# Altium PCB 遥控按键.PCBDOC
Units mm, origin at the board's own origin, x right, y up, seen from the top; angles counter-clockwise.
Board outline 70.36 x 87.5 mm, 2 copper layers (Top Layer, Bottom Layer); 27 components, 30 nets, 102 pads, 49 vias.
Unrouted connection lines stored in the file: 6.
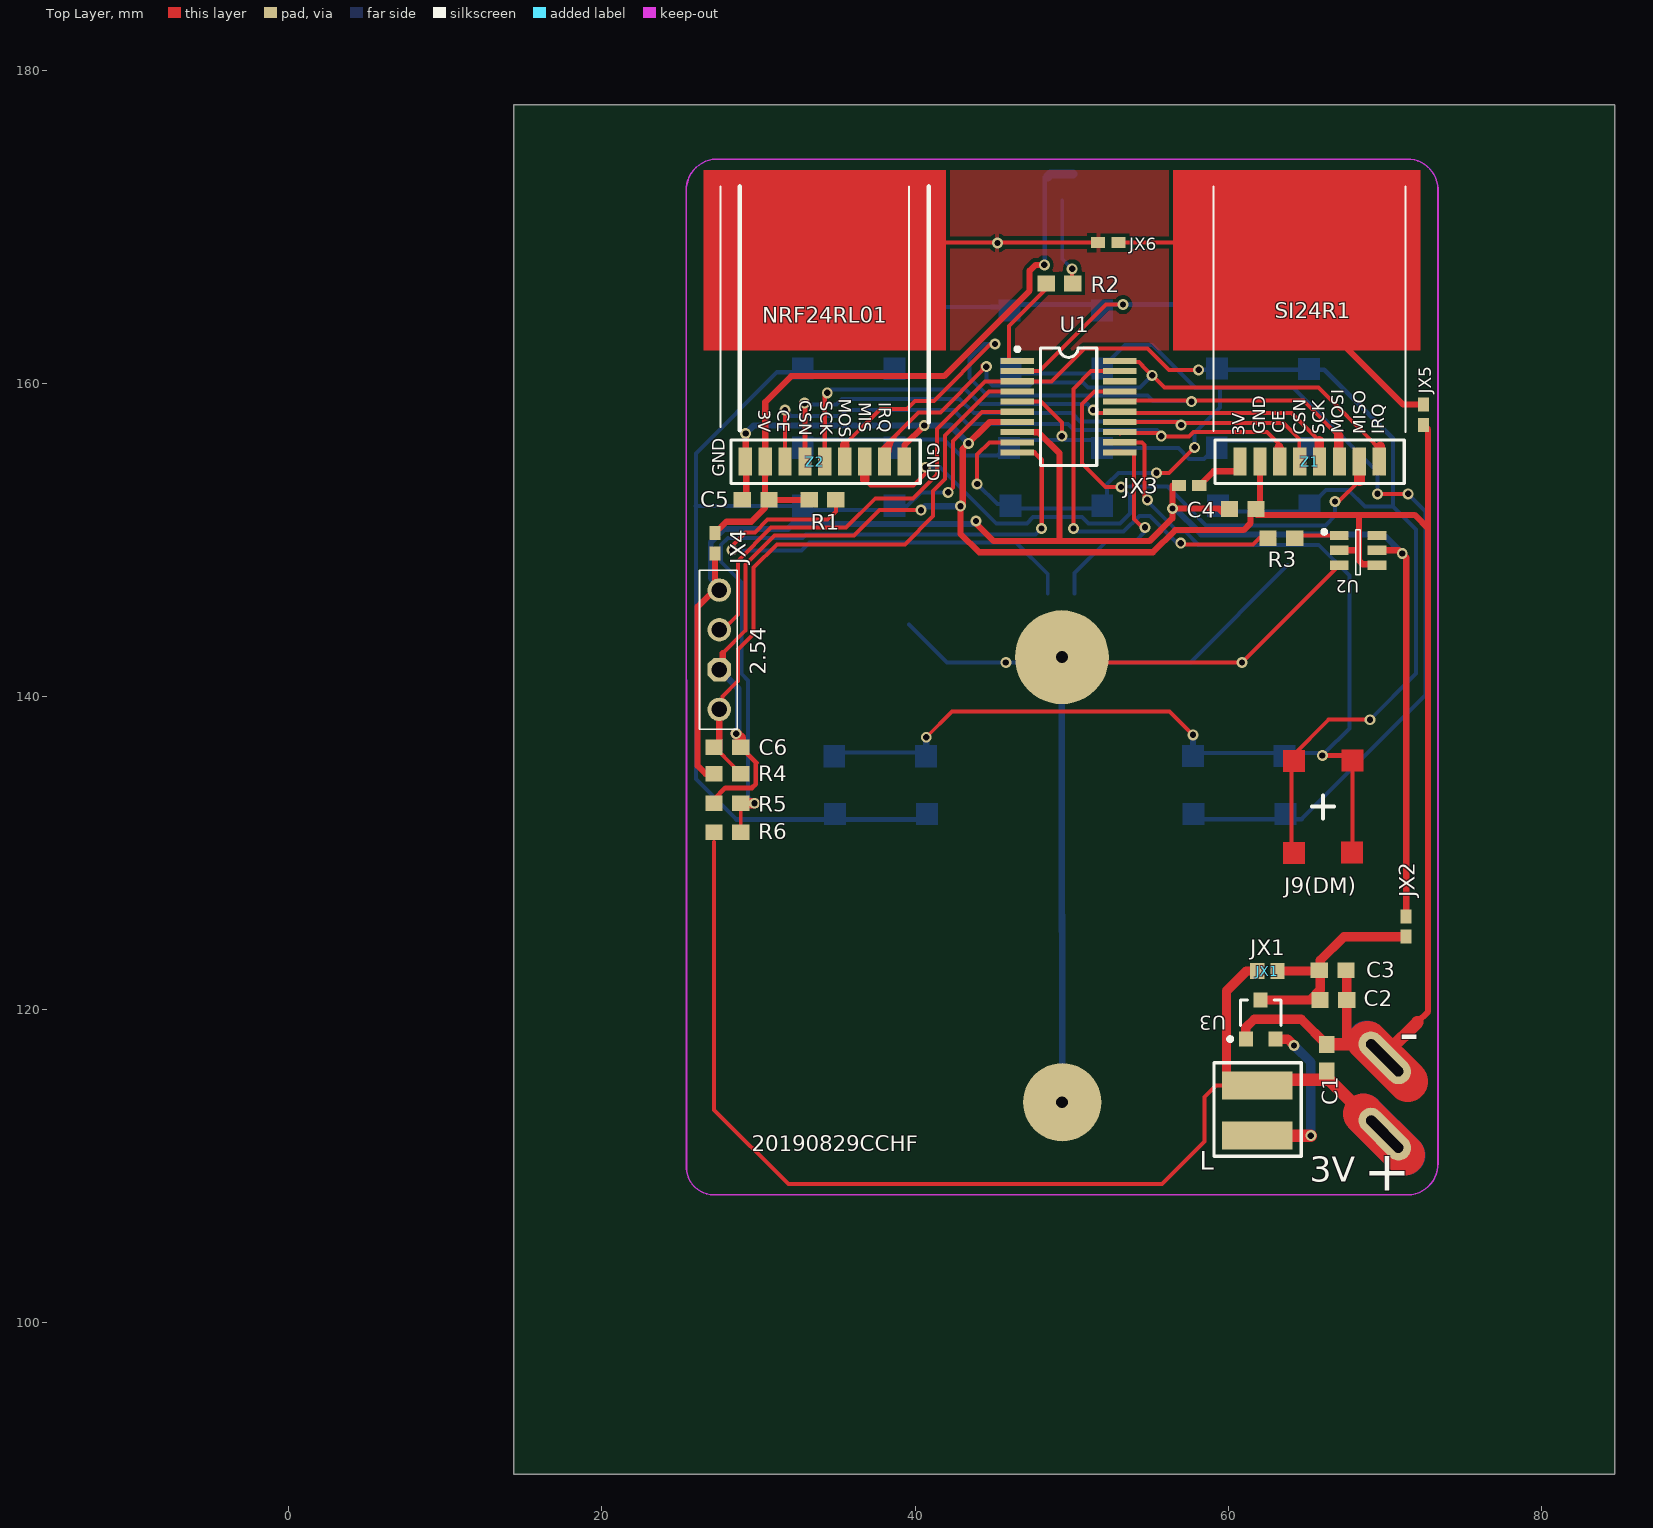
[diagram p0: Top Layer view]
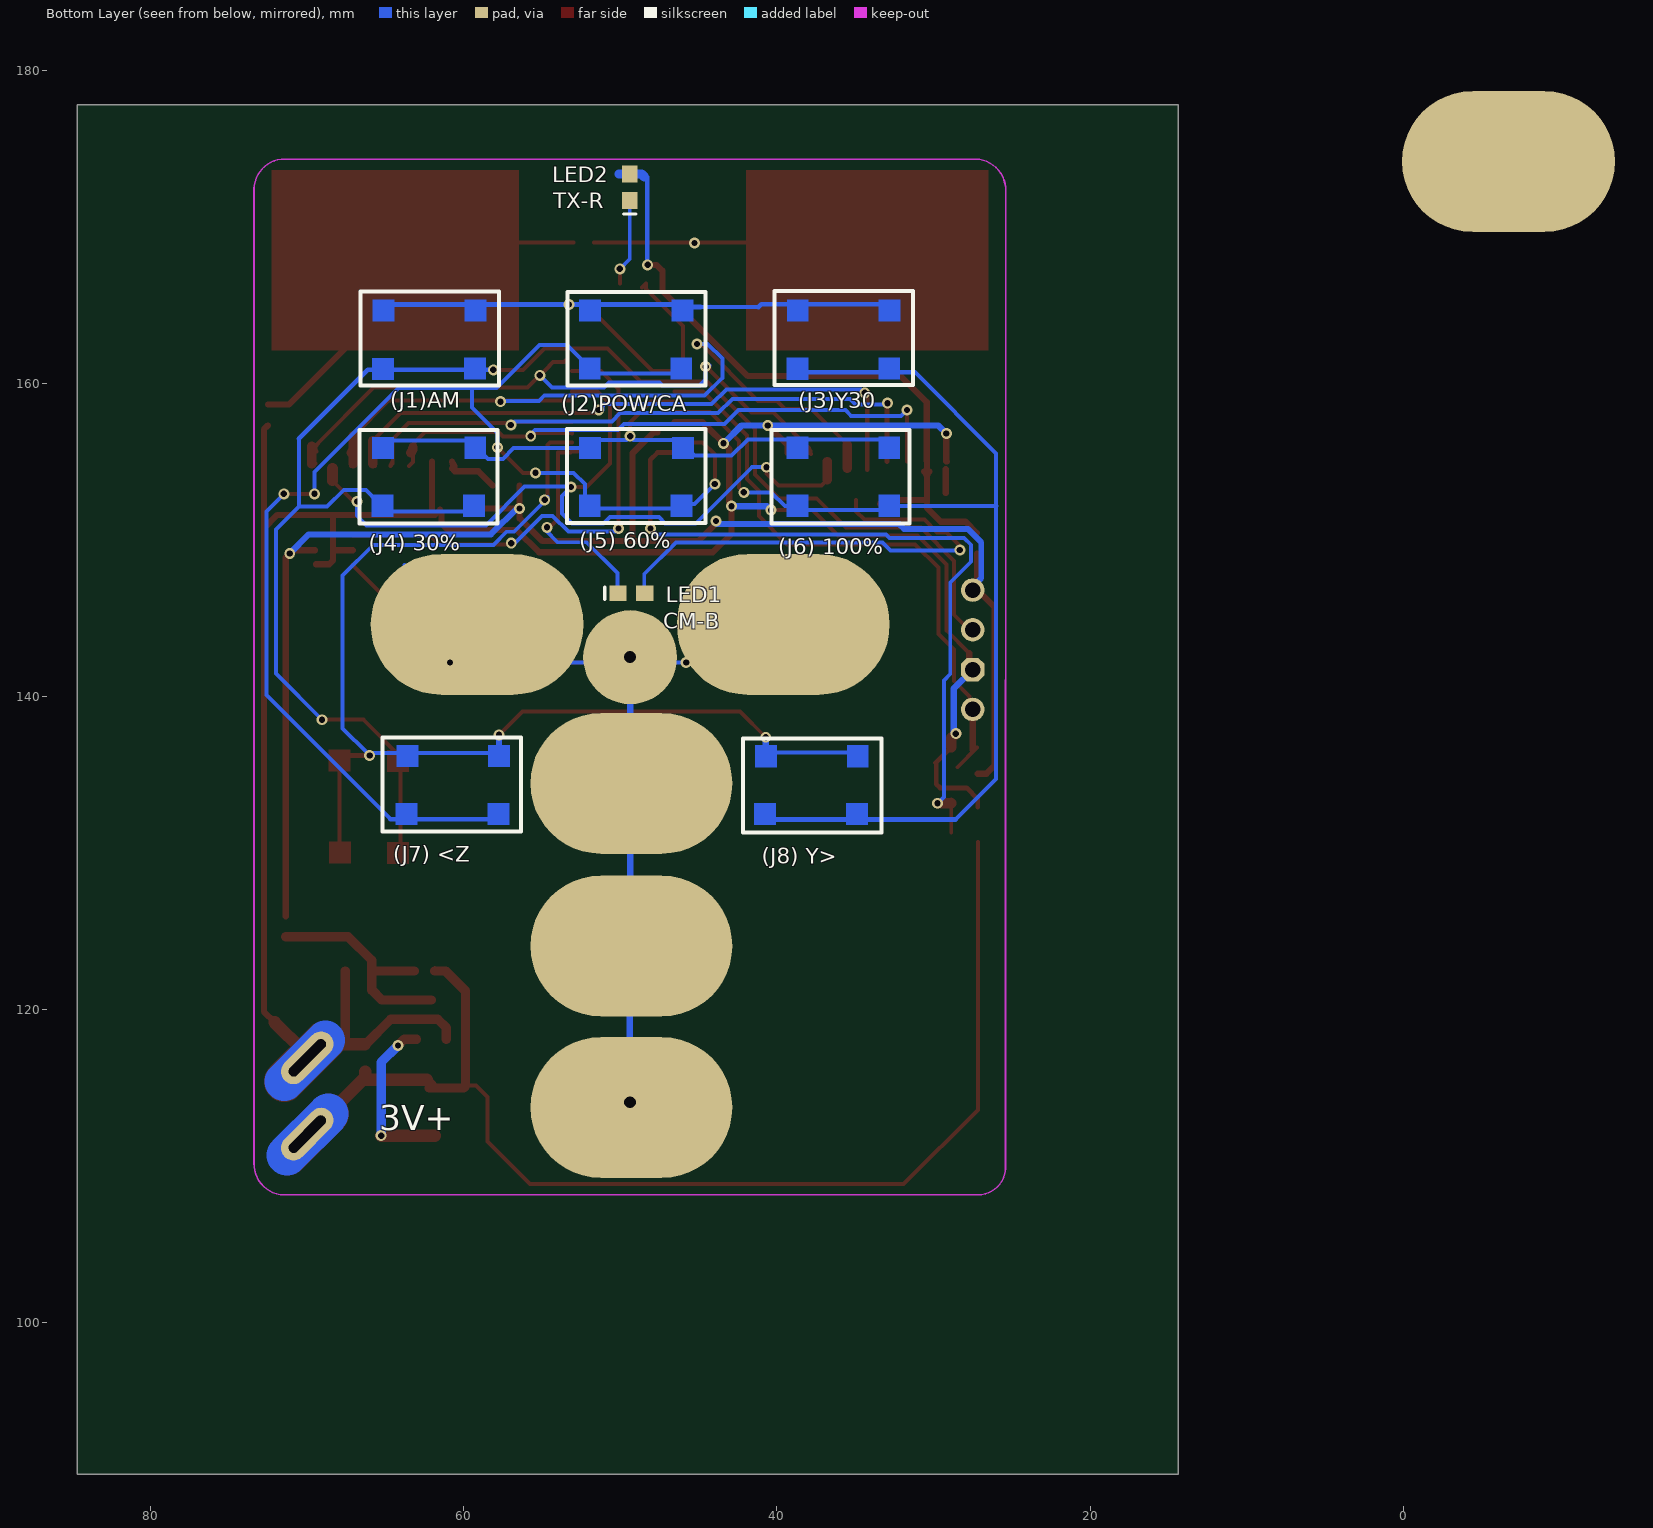
[diagram p1: Bottom Layer view, seen from below]

## Layer stack, top to bottom
Top Layer: signal copper 0.0356
Dielectric: dielectric 0.32, FR-4, Dk 4.8
Bottom Layer: signal copper 0.0356

## Board outline
19.304,90.297 84.709,90.297 84.709,177.8 14.351,177.8 14.351,90.297

## Design rules (kind name [scope] priority, off if disabled: settings)
Clearance [All] p1: gap=0.254
FabricationTestPointUsage TestPointUsage [All] p1: valid=0 allowmultiple=FALSE
FabricationTestpoint Testpoint [All] p1: side=3 testpointundercomponent=TRUE minsize=1.016 maxsize=2.54 preferedsize=1.524 minholesize=0 maxholesize=1.016 preferedholesize=0.813 testpointgrid=0.025 allowsidetop=TRUE allowsidebottom=TRUE usegrid=TRUE gridtolerance=0
PolygonConnect [All] p1: connectstyle=Relief reliefconductorwidth=0.254 reliefentries=4 polygonreliefangle="90 Angle"
RoutingVias [All] p1: holewidth=0.4 width=0.8 viastyle="Through Hole" minholewidth=0.4 minwidth=0.6 maxholewidth=1 maxwidth=1.5
SilkscreenOverComponentPads [All] p1: minsilkscreentomaskgap=0.254
SolderMaskExpansion [All] p1: expansion=0.102
Width Width_9 [InNet('3V3')] p1: maxlimit=1 minlimit=0.254 preferedwidth=0.6 toplayer_prefwidth=0.55 minimp=50.000000 maximp=50.000000 favimp=50.000000
Width Width_8 [InNet('3V+')] p2: maxlimit=3 minlimit=0.254 preferedwidth=0.8 toplayer_prefwidth=0.55 minimp=50.000000 maximp=50.000000 favimp=50.000000
Width Width_7 [InNet('L-3V')] p3: maxlimit=1 minlimit=0.254 preferedwidth=0.6 toplayer_prefwidth=0.55 minimp=50.000000 maximp=50.000000 favimp=50.000000
Width Width_6 [InNet('T-3V')] p4: maxlimit=1 minlimit=0.254 preferedwidth=0.6 toplayer_prefwidth=0.55 minimp=50.000000 maximp=50.000000 favimp=50.000000
Width Width_5 [InNet('3V')] p5: maxlimit=1 minlimit=0.254 preferedwidth=0.6 toplayer_prefwidth=0.39 minimp=50.000000 maximp=50.000000 favimp=50.000000
Width Width_4 [InNet('T-3V')] p6: maxlimit=1 minlimit=0.254 preferedwidth=0.6 toplayer_prefwidth=0.55 minimp=50.000000 maximp=50.000000 favimp=50.000000
Width Width_3 [InNet('D1-')] p7: maxlimit=1 minlimit=0.3 preferedwidth=0.8 toplayer_prefwidth=0.6 minimp=50.000000 maximp=50.000000 favimp=50.000000
Width Width_2 [InNet('GND')] p8: maxlimit=3 minlimit=0.254 preferedwidth=0.8 toplayer_prefwidth=0.39 minimp=50.000000 maximp=50.000000 favimp=50.000000
Width Width_1 [InNet('3V')] p9: maxlimit=1 minlimit=0.254 preferedwidth=0.6 toplayer_prefwidth=0.55 minimp=50.000000 maximp=50.000000 favimp=50.000000
Width [All] p10: maxlimit=2 minlimit=0.254 preferedwidth=2 bottomlayer_prefwidth=0.8 minimp=50.000000 maximp=50.000000 favimp=50.000000
25 further rules are at their usual default settings.

## Components (designator, comment, footprint, x,y, rotation, side; value= is the part's Value field where it differs from the comment)
2.54 "2.54HP" HDR1X4 27.5,139.167 r90 top (schematic designator SX)
C1 "10uf" CR1608-0603 66.3,116.916 r90 top locked
C2 "10uf" CR1608-0603 66.726,120.6 r180 top
C3 "0.1uf" CR1608-0603 66.675,122.5 r0 top
C4 "0.01uf" CR1608-0603 60.935,151.968 r180 top
C5 "0.01uf" CR1608-0603 29.82,152.552 r0 top
C6 "0.1uf" CR1608-0603 28.016,136.754 r0 top
JX1 "JX1" CR1005-0402#1 62.509,122.453 r0 top
JX2 "JX3" CR1005-0402#2 71.374,125.298 r270 top
JX3 "JX2" CR1005-0402#2 57.506,153.467 r0 top
JX4 "JX2" CR1005-0402#2 27.229,149.784 r270 top
JX5 "JX2" CR1005-0402#2 72.492,157.988 r90 top
JX6 "JX2" CR1005-0402#2 52.349,168.986 r0 top
L "22UH" L7 60.9,113.741 r270 top locked
LED1 "CM-B" CC1608-0603 49.301,146.583 r180 bottom
LED2 "TX-R" CC1608-0603 49.403,172.517 r90 bottom
R1 "1K" CR1608-0603 34.087,152.552 r180 top
R2 "4.7K" CR1608-0603 49.225,166.37 r180 top
R3 "4.7K" CR1608-0603 63.398,150.089 r180 top
R4 "10K" CR1608-0603 28.016,135.052 r0 top
R5 "500K" CR1608-0603 28.016,133.172 r180 top
R6 "500K" CR1608-0603 28.016,131.318 r180 top
U1 "STM8L051F3P6" SSOP20 49.809,158.501 r270 top locked
U2 "UTouch1B" SOT23-6_M 68.301,149.327 r0 top
U3 "BL8536" SO-G3/C2.5 62.078,119.355 r0 top
Z1 "SI24R1" MHDR1X8 69.65,155 r180 top locked
Z2 "NRF24L01" MHDR1X8 38.049,155 r180 top locked

## Footprints (in the part's own frame and the unit in brackets; to place one, negate y for a bottom-side part, rotate by r counter-clockwise, add the part's x,y. Pads: shape width x height; smd on the part's side, far side on the other; paste and mask are expansions set on the pad)
CC1608-0603 [mm] "Chip Capacitor; Body 1.6 x 0.8 mm (LxW typ)"
  rect 1.1x1 smd: 1(-0.85,0) 2(0.85,0)
  silkscreen extent -1.7,-0.4 -1.7,0.4
CR1005-0402#1 [mm] "Chip Resistor; Body 1.1 x 0.5 mm (LxW typ)"
  rect 0.9x1 smd: 1(-0.65,0) 2(0.65,0)
CR1005-0402#2 [mm] "Chip Resistor; Body 1.1 x 0.5 mm (LxW typ)"
  rect 0.9x0.7 smd: 1(-0.65,0) 2(0.65,0)
CR1608-0603 [mm] "Chip Resistor; Body 1.6 x 0.8 mm (LxW typ)"
  rect 1.1x1 smd: 1(-0.85,0) 2(0.85,0)
HDR1X4 [mm]
  round 1.5 hole 1: 1(0,0) 3(5.08,0) 4(7.62,0)
  oct 1.5x1.5 hole 1: 2(2.54,0)
  silkscreen extent -1.27,-1.14 8.89,1.27
L7 [mm]
  rect 1.8x4.5 smd: 1(1.8,0.964) 2(-1.4,0.964)
  silkscreen extent -2.86,-1.8 3.12,3.76
MHDR1X8 [mm] "Connector; Header; 8 Position"
  rect 0.85x1.8 smd: 1(0,0) 2(1.27,0) 3(2.54,0) 4(3.81,0) 5(5.08,0) 6(6.35,0) 7(7.62,0) 8(8.89,0)
  silkscreen extent -1.6,-1.36 10.49,1.4
SO-G3/C2.5 [mm]
  rect 0.9x0.95 smd: 1(-0.95,-1.25) 2(0.95,-1.25) 3(0,1.25)
  silkscreen extent -2.07,-1.37 1.3,1.25
SOT23-6_M [mm]
  rect 1.2x0.59 smd: 1(-1.2,0.95) 2(-1.2,0) 3(-1.2,-0.95) 4(1.2,-0.95) 5(1.2,0) 6(1.2,0.95)
  silkscreen extent -2.29,-1.55 0.15,1.31
SSOP20 [mm] "SSOP, Plastic; 20 Leads; Body Width 5.3 mm; Pitch 0.65 mm"
  rect 0.39x2.15 smd: 1(-2.925,-3.275) 2(-2.275,-3.275) 3(-1.625,-3.275) 4(-0.975,-3.275) 5(-0.325,-3.275) 6(0.325,-3.275) 7(0.975,-3.275) 8(1.625,-3.275) 9(2.276,-3.275) 11(2.925,3.275) 13(1.625,3.275) 15(0.325,3.275) 16(-0.325,3.275) 17(-0.975,3.275) 18(-1.625,3.275) 19(-2.275,3.275) 20(-2.925,3.275)
  rect 0.395x2.15 smd: 10(2.925,-3.275) 12(2.276,3.275) 14(0.975,3.275)
  silkscreen extent -3.8,-3.4 3.75,1.8

## Part data
U1: library part ST6208CN6, "8-Bit ROM MCU with A/D Converter, Two Timers, Oscillator Safeguard and Safe Reset, 20-Pin SSOP, Industrial"
U3: library part QNPN, "NPN Bi"

## Free pads (board coordinates)
  oval 13.6x9 smd far side: 0(-6.73,174.166) 0(39.6,144.6) 0(59.15,144.6)
  rect 0.85x1.8 smd: 0(39.319,155)
  oval 12.9x9 smd far side: 0(49.3,113.741) 0(49.3,124.05) 0(49.3,134.442)
  round 6 hole 0.762: 0(49.378,142.5)
  round 5 hole 0.762: 0(49.4,114.071)
  oval 4.1x1.6 hole 0.65 slot 3.1 at 135 deg rot 135: 1(70,112.038) 1(70,116.91)

## Via types
v1: diameter 0.7, hole 0.4, Top Layer to Bottom Layer, 49 vias

## Nets (pads, with @x,y where several pads share a name; then routed paths per layer and width w, separated by ;. In a path a pad name is that pad's centre, name@x,y a point inside that pad or via, vN(x,y) a via of type N, cw(c..) or ccw(c..) an arc to the next point about the centre after c; other vN are vias at no path point)
3.3V: 
3V: 2.54.4 C2.2 C3.1 C4.2 C5.2 JX1.2 JX2.1 JX2.2 JX3.1 JX3.2 JX4.1 JX4.2 LED2.2 R1.2 R4.1 U1.8 U2.5 U3.3 Z1.8 Z2.7 | length 169.2
  Top Layer w0.39: JX4.2 27.229,147.058 2.54.4 ; JX4.1 27.95,151.155 29.54,151.155 30.414,152.029 ; Z2.7@30.429,155.057 30.414,155.042 30.414,152.39 30.577,152.552 33.172,152.552 R1.2@33.426,152.298 ; 30.429,158.801 32.08,160.452 41.859,160.452 47.32,165.913 47.32,167.183 47.701,167.564 v1(48.26,167.564) ; JX3.1@56.439,153.467 v1(56.439,151.994) 59.399,151.994 C4.2@59.729,151.663 ; JX3.2 59.07,154.381 60.58,154.381 60.604,154.406 Z1.8@60.658,154.822 ; Z1.8@60.605,154.407 Z1.8@60.61,154.411 ; Z1.8@60.76,154.561 60.658,154.46 Z1.8@60.61,154.411 ; Z1.8 60.61,154.711 Z1.8@60.61,154.411 ; Z2.7@30.267,154.362 cw(c29.911,154.006) 30.414,154.006 ccw(c29.911,154.006) Z2.7@30.267,154.362 ; 30.414,153.933 cw(c31.021,153.933) 30.592,154.362 ccw(c31.021,153.933) 30.414,153.933
  Top Layer w0.4: R4.1 26.619,135.052 26.111,135.56 26.111,145.72 27.178,146.787 2.54.4 ; Z2.7@30.429,155.057 30.429,158.801 ; v1(43.891,151.206) 43.891,151.054 45.025,149.92 54.974,149.92 56.439,151.384 v1(56.439,151.994) ; 47.638,156.874 47.875,156.874 49.225,155.524 49.225,149.962 ; Z1.8@60.605,154.407 Z1.8 ; Z1.8@60.658,154.46 Z1.8@60.658,154.822 ; U2.5 70.917,149.327 71.374,148.869 JX2.1
  Top Layer w0.6: U3.3 65.246,120.605 65.876,121.234 ; JX1.2 C3.1@65.825,122.453 ; 65.888,121.234 65.888,123.139 67.397,124.648 JX2.2
  Bottom Layer w0.3: v1@48.285,167.589 48.285,173.177 48.463,173.177
  Bottom Layer w0.38: 2.54.4@27.711,146.787 26.949,147.549 26.949,149.835 27.813,150.698 31.883,150.698 32.188,151.003 43.84,151.003 43.891,151.054 v1(43.891,151.206)
  Bottom Layer w0.4: v1@56.528,152.083 58.269,150.343 69.901,150.343 v1(71.12,149.123)
  Bottom Layer w0.6: 48.463,173.177 48.653,173.367 50.089,173.367
3V+: C1.1 JX1.1 L.2 pad.1@70,112.038 R6.2 | length 85.2
  Top Layer w0.254: 27.166,130.683 27.166,113.575 31.902,108.839 55.778,108.839 58.496,111.557 58.496,114.402 59.236,115.141 59.893,115.141 L.2 ; JX1.1 JX1.1@61.859,122.642
  Top Layer w0.6: JX1.1 61.163,122.453 59.893,121.183 59.893,115.141 59.893,115.113 60.02,114.986 L.2@62.205,114.986 ; L.2@62,115.141 L.2@62.378,115.519
  Top Layer w0.8: L.2@62.378,115.519 66.446,115.519 pad.1@68.631,113.335 ; C1.1@66.3,115.666 C1.1@66.3,116.008 ; pad.1@69.178,112.002 pad.1@69.571,112.395
  Top Layer w2.6: pad.1@68.631,113.335 pad.1@71.26,110.706
  Bottom Layer w2.6: pad.1@68.658,113.333 pad.1@71.298,110.693
AHLB: 
BAT_ADC: R5.1 R6.1 U1.10 | length 47.4
  Top Layer w0.254: R6.1 R5.1@28.866,133.426
  Top Layer w0.3: U1.10 47.624,155.576 48.094,155.106 v1@48.094,150.724
  Top Layer w0.7: R5.1 v1(29.743,133.172)
  Bottom Layer w0.254: v1(29.743,133.172) 29.337,133.579 29.337,141.021 28.931,141.427 28.931,147.269 27.59,148.61 27.59,149.655 28.062,150.127 32.823,150.127 33.038,150.343 47.701,150.343 v1(48.082,150.724)
CE: U1.13 Z1.6 Z2.6 | length 41.2
  Top Layer w0.254: Z2.6 v1(31.699,158.293) ; U1.13@53.081,156.804 53.096,156.82 55.524,156.82 55.753,156.591 57.513,156.591 57.798,156.876 62.478,156.876 63.246,156.108 63.246,154.965 Z1.6@63.5,154.711
  Top Layer w0.6: 63.246,155.907 ccw(c63.732,155.907) 63.388,155.563 cw(c63.732,155.907) 63.246,155.907
  Bottom Layer w0.254: v1(31.699,158.293) 32.08,157.912 35.255,157.912 35.636,158.293 42.469,158.293 43.358,157.404 49.784,157.404 50.165,157.023 55.448,157.023 v1@55.728,156.743
  other v1: 55.728,156.616
CMOUT: R3.1 R3.2 U1.19 U2.1 | length 29.6
  Top Layer w0.254: v1@50.038,150.851 v1@50.19,150.698 ; v1@50.114,150.673 50.114,159.639 51.251,160.776 U1.19 ; v1@56.972,149.911 57.175,149.708 61.595,149.708 62.164,150.277 R3.2@62.687,150.277 ; R3.1@64.248,150.277 U2.1
  Bottom Layer w0.254: v1(50.114,150.724) 50.317,150.52 53.315,150.52 54.325,151.531 54.997,151.531 56.753,149.774 v1@56.963,149.774
  other v1: 56.972,149.784
CSN: U1.14 Z1.5 Z2.5 | length 42.9
  Top Layer w0.254: U1.14 56.799,157.526 v1(56.998,157.328) ; v1@56.998,157.452 63.528,157.452 64.541,156.439 64.541,154.864 64.694,154.711 Z1.5
  Top Layer w0.3: v1(32.944,158.725) 32.969,158.699 Z2.5
  Bottom Layer w0.254: v1(32.944,158.725) 32.868,158.648 34.976,158.648 35.331,159.004 42.85,159.004 43.764,158.09 50.013,158.09 50.546,157.556 56.769,157.556 v1(56.998,157.328)
GND: 2.54.2 C1.2 C2.1 C3.2 C4.1 C5.1 C6.2 JX5.1 JX5.2 JX6.2 pad.0@39.319,155 pad.1@70,116.91 R5.2 U1.7 U2.2 U2.4 U3.1 Z1.7 Z2.8 | length 194.8
  Top Layer w0.254: 27.711,142.748 29.185,144.221 29.185,148.43 31.021,150.266 36.093,150.266 37.719,151.892 40.183,151.892 v1@40.386,151.689 ; JX6.2 59.258,168.986
  Top Layer w0.3: R5.2@27.166,132.918 27.166,133.44 27.874,134.148 29.584,134.148 29.82,134.384 29.82,135.699 29.87,135.749 C6.2
  Top Layer w0.4: 2.54.2@27.711,141.707 27.711,142.748 ; Z2.8 29.185,155.025 v1(29.185,156.794) ; C5.1@29.21,152.994 Z2.8@29.21,154.508 ; pad.0@39.319,155.549 39.319,156.032 v1@40.615,157.328 ; U1.7 44.775,157.526 43.053,155.804 43.053,152.298 v1(42.901,152.146) 42.901,150.393 44.094,149.2 55.194,149.2 56.617,150.622 60.985,150.622 61.429,151.066 C4.1@61.429,151.663 ; 59.258,168.986 60.833,168.986 71.181,158.638 JX5.2 ; C4.1@61.519,151.917 C4.1@61.849,151.587 ; Z1.7 62.03,151.768 C4.1@61.849,151.587 ; U2.2 68.263,149.327 ; 68.351,151.562 68.351,148.692 68.605,148.438 U2.4@69.437,148.438 ; pad.1@69.127,117.766 69.545,117.348 pad.1@70.256,117.348 ; 72.085,119.177 72.771,119.863 72.771,150.724 ; JX5.1@72.517,157.302 72.771,157.048 72.771,150.724 ; C4.1@61.849,151.587 71.907,151.587 72.771,150.724
  Top Layer w0.6: U3.1 61.128,118.841 61.666,119.38 64.668,119.38 C1.2@66.282,117.766 ; 67.576,117.766 C3.2@67.576,122.453 ; C1.2@66.282,117.766 C1.2 66.345,117.766 66.345,117.704 C1.2@66.282,117.766
  Top Layer w0.7: v1(28.575,137.617) 28.866,137.326 C6.2
  Top Layer w0.8: C1.2@66.345,117.766 pad.1@69.127,117.766 ; pad.1@70.256,117.348 72.085,119.177
  Top Layer w2.6: pad.1@68.897,117.97 71.476,115.392
  Bottom Layer w0.4: 2.54.2 28.704,140.503 v1@28.704,137.746 ; v1(29.185,156.794) 29.693,157.302 v1(40.589,157.302) 42.266,157.302 v1(43.409,156.159) ; v1(40.386,151.892) 40.64,152.146 v1(42.901,152.146) v1@42.901,152.095 ; 68.683,116.994 pad.1@68.683,118.21
  Bottom Layer w2.5: pad.1@68.836,118.032 71.476,115.392
GND2: JX6.1 | length 15.2
  Top Layer w0.254: 37.541,168.986 JX6.1
  Top Layer w0.4: 37.541,167.97 37.541,168.986
  other v1: 45.263,168.961
IRQ: U1.20 Z1.1 Z2.1 | length 49.8
  Top Layer w0.254: Z2.1@37.92,155.744 ccw(c37.627,156.355) 38.282,156.18 ; 38.049,155.956 40.234,158.14 41.631,158.14 44.323,160.833 v1@44.323,161.138 ; 38.25,156.06 ccw(c38.805,155.911) Z2.1@38.307,155.624 ; U1.20@53.492,161.442 53.583,161.352 54.317,161.352 54.54,161.129 54.54,161.106 55.931,159.715 65.761,159.715 69.469,156.007 ; Z1.1@69.399,155.636 ccw(c68.991,155.897) 69.459,156.023 ccw(c69.81,156.117) Z1.1@69.722,155.764 ; Z1.1@69.469,154.864 Z1.1@69.621,154.711 ; Z2.1@37.839,155.475 cw(c38.493,155.475) 38.031,155.938 ccw(c38.493,155.475) Z2.1@37.839,155.475 ; Z2.1@38.093,155.475 cw(c39.361,155.475) 38.464,156.371 ccw(c39.361,155.475) Z2.1@38.093,155.475 ; Z2.1@38.347,155.475 cw(c40.228,155.475) 38.898,156.805 ccw(c40.228,155.475) Z2.1@38.347,155.475 ; 69.327,156.149 cw(c68.653,155.475) 69.606,155.475 ccw(c68.653,155.475) 69.327,156.149
  Top Layer w0.6: Z1.1@69.723,154.838 69.723,155.981
  Bottom Layer w0.254: v1@44.323,161.138 44.552,160.909 44.552,160.249 44.955,159.846 47.298,159.846 47.498,160.045 50.724,160.045 51.054,159.715 54.356,159.715 v1(55.143,160.503)
  other v1: 44.552,161.061
JA: U1.2 | length 41.7
  Top Layer w0.254: U1.2 47.949,160.776 52.197,165.024 v1(53.289,165.024)
  Bottom Layer w0.254: 41.173,164.871 44.882,164.871
  Bottom Layer w0.3: 33.069,165.049 40.996,165.049 41.173,164.871 ; 44.882,164.871 45.955,164.871 46.107,165.024 64.719,165.024 65.202,164.541
  Bottom Layer w0.4: 32.536,164.516 33.069,165.049
JB: U1.5 | length 38.7
  Top Layer w0.254: U1.5 48.057,158.826 49.378,157.505 v1(49.378,156.616)
  Bottom Layer w0.254: 32.588,156.261 32.741,156.413 41.859,156.413 42.901,155.372 45.263,155.372 46.279,156.388 49.149,156.388 v1(49.378,156.616) 49.606,156.388 51.74,156.388 52.273,155.854 56.82,155.854 57.5,155.174 58.451,155.174 59.614,156.337 64.795,156.337 ; 58.673,155.296 58.723,155.346 ; 65.405,155.956 65.43,155.931
JC: U1.12 | length 76.4
  Top Layer w0.254: v1(40.716,137.389) 42.367,139.04 56.261,139.04 v1(57.76,137.541) ; U1.12 54.493,156.225 54.661,156.058 54.661,152.73 v1(54.839,152.552) v1@55.067,152.552 ; 67.945,130.302 67.945,136.144
  Top Layer w0.3: v1(66.015,136.22) 67.462,136.22
  Bottom Layer w0.254: 34.519,136.195 34.747,136.423 40.665,136.423 40.894,136.195 40.894,135.89 40.716,136.068 ; v1@54.661,152.73 54.661,152.654 56.8,150.515 57.275,150.515 58.108,149.682 65.786,149.682 67.742,147.726 67.742,137.947 66.167,136.373 58.09,136.373 ; 57.76,136.042 57.81,135.992
  Bottom Layer w0.4: 40.716,136.068 v1(40.716,137.389) ; 57.76,136.042 v1(57.76,137.541)
JD: U1.6 | length 77.1
  Top Layer w0.254: v1(42.113,153.035) 42.418,153.34 42.418,156.312 44.282,158.176 U1.6
  Bottom Layer w0.254: 25.984,152.146 32.995,152.146 ; 28.6,132.131 25.997,134.734 25.997,155.512 31.191,160.706 ; 32.662,152.273 32.944,151.991 ; 33.043,151.892 38.049,151.892 38.303,152.146 39.497,152.146 40.386,153.035 v1(42.113,153.035) ; 38.379,160.706 38.659,160.985
  Bottom Layer w0.3: 28.6,132.131 40.538,132.131 40.919,132.512 ; 31.191,160.706 38.379,160.706
JE: U1.9 | length 88.2
  Top Layer w0.254: v1@43.967,153.416 43.967,155.448 44.745,156.225 U1.9 ; v1(55.423,154.28) 56.236,154.28 v1(57.861,155.905) ; v1@69.52,152.933 v1(71.501,152.933)
  Bottom Layer w0.254: v1(43.967,153.568) 45.263,152.273 46.203,152.273 46.482,151.994 52.019,151.994 ; 46.025,160.63 51.664,160.63 ; 51.943,160.96 53.416,162.433 55.169,162.433 57.912,159.69 59.487,159.69 ; 52.273,151.765 52.273,153.568 52.984,154.28 v1(55.423,154.28) ; v1(57.861,155.905) 57.861,156.82 59.487,158.445 59.487,159.69 ; 64.694,132.156 72.619,140.081 72.619,151.816 v1(71.501,152.933) ; v1(69.545,152.933) 69.545,154.33 64.186,159.69 59.487,159.69
  Bottom Layer w0.3: 58.039,132.156 64.694,132.156
JF: 
L1: L.1 U3.2 | length 11
  Top Layer w0.6: U3.2 63.81,118.105 v1(64.211,117.704) ; v1@65.275,111.941 v1(65.278,111.938)
  Top Layer w0.8: L.1 v1@65.275,111.941
  Bottom Layer w0.6: v1(64.211,117.704) 65.278,116.637 v1(65.278,111.938)
LED2: LED2.1 R2.1 | length 5.6
  Top Layer w0.254: R2.1@50.038,166.37 v1(50.038,167.31)
  Bottom Layer w0.254: LED2.1 49.403,167.945 v1(50.038,167.31)
MISO: U1.17 Z1.2 Z2.2 | length 52
  Top Layer w0.254: 36.779,153.848 37.16,153.467 39.903,153.467 40.665,154.229 v1(40.665,154.635) ; U1.17 51.45,159.476 50.653,158.679 50.653,154.884 52.172,153.365 v1(53.162,153.365) v1@53.315,153.518 ; v1(66.827,152.451) 67.056,152.451 68.377,153.772 ; Z1.2@68.38,154.561 Z1.2@68.53,154.711
  Top Layer w0.6: 36.779,153.848 Z2.2
  Top Layer w0.7: 68.377,153.772 68.38,153.775 Z1.2@68.38,154.561
  Bottom Layer w0.254: v1@40.691,154.635 41.605,154.635 45.187,151.054 47.142,151.054 47.549,151.46 50.673,151.46 51.079,151.054 53.086,151.054 53.721,151.689 53.721,152.783 53.114,153.391 56.134,153.391 58.598,150.927 66.218,150.927 66.827,151.536 v1@66.827,152.553
MOSI: U1.16 Z1.3 Z2.3 | length 49.6
  Top Layer w0.254: 35.509,156.083 37.795,158.369 39.497,158.369 40.005,158.877 41.199,158.877 44.831,162.509 v1(45.11,162.509) ; U1.16 53.158,158.9 64.798,158.9 67.056,156.642 ; Z1.3@67.056,154.864 Z1.3@67.208,154.711
  Top Layer w0.6: Z2.3@35.509,154.559 35.509,156.083 ; Z1.3@67.056,154.864 67.056,156.642 ; 67.056,155.907 ccw(c67.542,155.907) 67.198,155.563 cw(c67.542,155.907) 67.056,155.907
  Bottom Layer w0.254: v1@45.06,162.458 v1(45.11,162.509) 44.425,162.509 43.485,161.569 43.485,160.35 44.628,159.207 54.864,159.207 55.194,158.877 v1@57.658,158.877
  other v1: 57.658,158.826
R3: 
RST: 2.54.1 C6.1 R4.2 U1.4 | length 38.3
  Top Layer w0.254: C6.1@27.217,136.728 R4.2@28.473,135.472 ; 2.54.1@27.711,139.167 27.711,140.005 28.702,140.995 28.702,143.002 29.693,143.993 29.693,148.22 31.18,149.708 39.345,149.708 41.148,151.511 41.148,153.111 41.91,153.873 41.91,156.667 44.719,159.476 U1.4
  Top Layer w0.4: C6.1@27.5,136.569 2.54.1
SCK: U1.15 Z1.4 Z2.4 | length 39.6
  Top Layer w0.254: v1(51.384,158.293) 51.573,158.104 54.317,158.104 54.332,158.09 64.059,158.09 65.811,156.337 ; Z1.4@65.659,154.711 Z1.4@65.811,154.864
  Top Layer w0.3: Z2.4@34.239,154.483 34.239,159.233 v1@34.493,159.487
  Top Layer w0.6: Z1.4@65.811,154.864 65.811,156.337
  Bottom Layer w0.254: v1(34.392,159.385) 34.62,159.614 43.231,159.614 44.171,158.674 51.003,158.674 51.156,158.521 v1@51.156,158.293
SWIM/JF: 2.54.3 U1.3 | length 99.7
  Top Layer w0.254: 2.54.3@27.711,144.247 28.677,145.212 28.677,148.641 30.81,150.774 35.585,150.774 37.459,152.648 39.872,152.648 41.402,154.178 41.402,157.074 44.454,160.126 U1.3 48.722,160.126 50.825,162.23 54.839,162.23 56.21,160.858 v1(58.115,160.858) ; 64.034,131.19 64.034,136.119 66.421,138.506 v1(69.063,138.506) ; 64.059,130.301 64.059,131.166
  Bottom Layer w0.254: 59.436,152.146 59.76,151.822 64.827,151.822 ; 65.507,151.968 65.507,152.425 66.263,153.182 67.671,153.182 68.732,152.121 70.536,152.121 ; v1(69.063,138.506) 72.009,141.453 72.009,150.647 70.536,152.121 ; 70.536,156.464 70.536,152.121
  Bottom Layer w0.3: v1(58.115,160.858) 66.142,160.858 70.536,156.464
T-LED: R2.2 U1.1 | length 6.8
  Top Layer w0.254: U1.1 46.016,161.426 45.999,161.442 45.999,163.652 48.375,166.028 R2.2 R2.2@48.617,166.128
TCH: pad.0@39.6,144.6 pad.0@49.3,113.741 pad.0@49.3,124.05 pad.0@49.3,134.442 pad.0@49.4,114.071 pad.0@49.378,142.5 pad.0@59.15,144.6 U2.3 | length 77.9
  Top Layer w0.254: pad.0@49.378,142.164 v1(60.888,142.164) U2.3
  Bottom Layer w0.254: pad.0@39.6,144.6 42.036,142.164 v1(45.796,142.164) pad.0@49.371,142.164 ; pad.0@49.371,142.9 pad.0@49.371,142.164 ; pad.0@63.795,148.377 57.582,142.164 pad.0@49.371,142.164
  Bottom Layer w0.4: pad.0@49.371,125 pad.0@49.371,142.164 ; pad.0@49.4,114.071 pad.0@49.4,126.035
TOG: U2.6
XY3V: LED1.2 R1.1 | length 31
  Top Layer w0.254: v1(28.321,149.352) 28.321,149.606 29.185,150.47 29.769,150.47 30.582,151.282 34.417,151.282 34.95,151.816 34.937,151.829 R1.1
  Bottom Layer w0.254: v1@28.321,149.327 32.741,149.327 33.249,149.835 46.457,149.835 48.477,147.814 LED1.2@48.477,146.583
Z-LED: LED1.1 U1.11 | length 13.6
  Top Layer w0.254: U1.11@52.73,155.626 53.137,155.626 53.188,155.575 53.975,155.575 53.975,151.333 v1@54.458,150.851
  Bottom Layer w0.254: LED1.1@50.177,146.583 50.177,147.865 52.155,149.844 54.01,149.844 54.75,150.584 54.534,150.8 v1(54.686,150.8)
pads on no net: U1.18

## Polygon pours and split planes (outlines as drawn)
GND2 on Top Layer "Top Layer-No Net" (solid, remove dead copper, pour order 2): 37.817,173.609 61.744,173.609 61.744,166.921 57.959,162.998 57.096,162.103 39.595,162.103 39.595,170.107 38.122,171.634 39.874,173.451 39.874,173.556

## Keep-outs
Keep-Out Layer:
  lines w0.1: 25.392,172.288 cw(c27.361,172.352) 27.297,174.32 71.435,174.32 cw(c71.435,172.35) 73.403,172.414 73.403,110.084 ; 25.395,172.288 25.403,109.854 ccw(c27.158,109.91) 27.144,108.154 ; 27.058,108.154 71.501,108.154 ; 71.498,108.154 ccw(c71.435,110.122) 73.403,110.186

## Other copper
Top Layer:
  region net SWIM/JF: 64.921,129.286 64.921,130.683 63.502,130.683 63.502,129.286
  region net SWIM/JF: 64.922,135.179 64.922,136.576 63.503,136.576 63.503,135.179
  region net JC: 68.653,135.204 68.653,136.601 67.234,136.601 67.234,135.204
  region net JC: 68.627,129.337 68.627,130.734 67.208,130.734 67.208,129.337
  rectangle net GND: 56.464,162.103 72.288,173.634
  rectangle net GND2: 26.492,162.077 41.986,173.609
Bottom Layer:
  rectangle net JB: 32.131,155.17 33.528,156.589
  rectangle net JB: 37.998,155.172 39.395,156.591
  rectangle net JC: 57.048,135.485 58.445,136.904
  rectangle net JC: 62.89,135.485 64.287,136.904
  rectangle net JE: 62.967,131.775 64.364,133.194
  rectangle net JE: 57.099,131.777 58.496,133.196
  rectangle net JC: 34.138,135.462 35.535,136.881
  rectangle net JC: 40.005,135.46 41.402,136.879
  rectangle net JD: 40.056,131.775 41.453,133.194
  rectangle net JD: 34.188,131.777 35.585,133.196
  rectangle net JA: 58.547,163.933 59.944,165.352
  rectangle net JA: 64.44,163.932 65.837,165.351
  rectangle net SWIM/JF: 64.465,160.201 65.862,161.62
  rectangle net SWIM/JF: 58.598,160.227 59.995,161.646
  rectangle net JB: 58.572,155.17 59.969,156.589
  rectangle net JB: 64.465,155.147 65.862,156.566
  rectangle net SWIM/JF: 64.491,151.46 65.888,152.879
  rectangle net SWIM/JF: 58.649,151.46 60.046,152.879
  rectangle net JB: 51.232,155.147 52.629,156.566
  rectangle net JE: 51.257,151.46 52.654,152.879
  rectangle net JA: 45.339,163.935 46.736,165.354
  rectangle net JA: 51.232,163.935 52.629,165.354
  rectangle net JD: 32.131,160.225 33.528,161.644
  rectangle net JA: 37.973,163.932 39.37,165.351
  rectangle net JA: 32.106,163.933 33.503,165.352
  rectangle net JD: 37.998,160.223 39.395,161.642
  rectangle net JD: 37.998,151.464 39.395,152.883
  rectangle net JE: 45.39,151.464 46.787,152.883
  rectangle net JB: 45.314,155.147 46.711,156.566
  rectangle net JE: 45.415,160.227 46.812,161.646
  rectangle net JD: 32.131,151.464 33.528,152.883
  rectangle net JE: 51.257,160.227 52.654,161.646

## Silkscreen, mask and mechanical layers (free items; w line width, h text height)
Top Overlay:
  lines w0.127: 27.559,157.201 27.559,172.568 ; 39.599,157.124 39.599,172.568 ; 59.055,156.947 59.055,172.568 ; 71.323,156.87 71.323,172.568
  lines w0.254: 65.354,132.969 66.777,132.969 ; 66.065,132.207 66.065,133.68
  lines w0.3: 28.804,156.997 28.804,172.568 ; 40.869,157.505 40.869,172.568
  text "SI24R1" at 62.992,164.16 h1
  text "NRF24RL01" at 30.251,163.855 h1
  text "MOS" at 35.128,159.004 h0.8 r270
  text "CSN" at 32.614,158.928 h0.8 r270
  text "SCK" at 33.934,158.877 h0.8 r270
  text "IRQ" at 37.668,158.801 h0.8 r270
  text "MIS" at 36.398,158.775 h0.8 r270
  text "3V" at 29.997,158.318 h0.8 r270
  text "CE" at 31.191,158.293 h0.8 r270
  text "CE" at 63.602,156.82 h0.8 r90
  text "MOSI" at 67.386,156.794 h0.8 r90
  text "GND" at 62.357,156.743 h0.8 r90
  text "SCK" at 66.167,156.743 h0.8 r90
  text "MISO" at 68.783,156.743 h0.8 r90
  text "IRQ" at 69.977,156.743 h0.8 r90
  text "CSN" at 64.948,156.718 h0.8 r90
  text "3V" at 61.062,156.642 h0.8 r90
  text "GND" at 40.767,156.185 h0.8 r270
  text "GND" at 27.838,154.026 h0.8 r90
  text "J9(DM)" at 63.576,127.432 h1
  text "-" at 70.917,117.272 h2.6
  text "20190829CCHF" at 29.566,110.947 h1
  text "3V" at 65.202,108.991 h1.6
  text "+" at 68.656,108.407 h2.6
Bottom Overlay:
  lines w0.254: 31.318,159.893 40.157,159.893 40.157,165.887 31.318,165.887 31.318,159.893 ; 31.521,151.028 40.361,151.028 40.361,157.023 31.521,157.023 31.521,151.028 ; 33.325,131.318 33.325,137.312 42.164,137.312 42.164,131.318 33.325,131.318 ; 44.552,159.842 53.391,159.842 53.391,165.837 44.552,165.837 44.552,159.842 ; 44.577,151.079 53.416,151.079 53.416,157.074 44.577,157.074 44.577,151.079 ; 56.363,131.369 65.202,131.369 65.202,137.363 56.363,137.363 56.363,131.369 ; 57.76,159.868 66.599,159.868 66.599,165.862 57.76,165.862 57.76,159.868 ; 57.836,151.028 66.675,151.028 66.675,157.023 57.836,157.023 57.836,151.028
  text "(J1)AM" at 64.694,158.42 h1
  text "(J3)Y30" at 38.633,158.394 h1
  text "(J2)POW/CA" at 53.772,158.217 h1
  text "(J5) 60%" at 52.629,149.454 h1
  text "(J4) 30%" at 66.065,149.301 h1
  text "(J6) 100%" at 39.929,149.073 h1
  text "(J7) <Z" at 64.516,129.438 h1
  text "(J8) Y>" at 40.97,129.311 h1
  text "3V+" at 65.405,112.293 h1.6
Top Solder:
  region: 64.922,135.179 64.922,136.576 63.503,136.576 63.503,135.179
  region: 68.653,135.204 68.653,136.601 67.234,136.601 67.234,135.204
  region: 68.627,129.337 68.627,130.734 67.208,130.734 67.208,129.337
Bottom Solder:
  rectangle: 32.131,155.17 33.528,156.589
  rectangle: 37.998,155.172 39.395,156.591
  rectangle: 57.048,135.485 58.445,136.904
  rectangle: 62.89,135.485 64.287,136.904
  rectangle: 62.967,131.775 64.364,133.194
  rectangle: 57.099,131.777 58.496,133.196
  rectangle: 34.138,135.462 35.535,136.881
  rectangle: 40.005,135.46 41.402,136.879
  rectangle: 40.056,131.775 41.453,133.194
  rectangle: 34.188,131.777 35.585,133.196
  rectangle: 32.106,163.933 33.503,165.352
  rectangle: 58.547,163.933 59.944,165.352
  rectangle: 64.44,163.932 65.837,165.351
  rectangle: 64.465,160.201 65.862,161.62
  rectangle: 58.598,160.227 59.995,161.646
  rectangle: 58.572,155.17 59.969,156.589
  rectangle: 64.465,155.147 65.862,156.566
  rectangle: 64.491,151.46 65.888,152.879
  rectangle: 58.649,151.46 60.046,152.879
  rectangle: 51.232,155.147 52.629,156.566
  rectangle: 51.257,151.46 52.654,152.879
  rectangle: 45.339,163.935 46.736,165.354
  rectangle: 51.232,163.935 52.629,165.354
  rectangle: 32.131,160.225 33.528,161.644
  rectangle: 37.973,163.932 39.37,165.351
  rectangle: 37.998,160.223 39.395,161.642
  rectangle: 37.998,151.464 39.395,152.883
  rectangle: 45.39,151.464 46.787,152.883
  rectangle: 45.314,155.147 46.711,156.566
  rectangle: 45.415,160.227 46.812,161.646
  rectangle: 32.131,151.464 33.528,152.883
  rectangle: 51.257,160.227 52.654,161.646